# EAGLE board Arduino HomeMonitorv1r4-current (EAGLE 6.6.0)
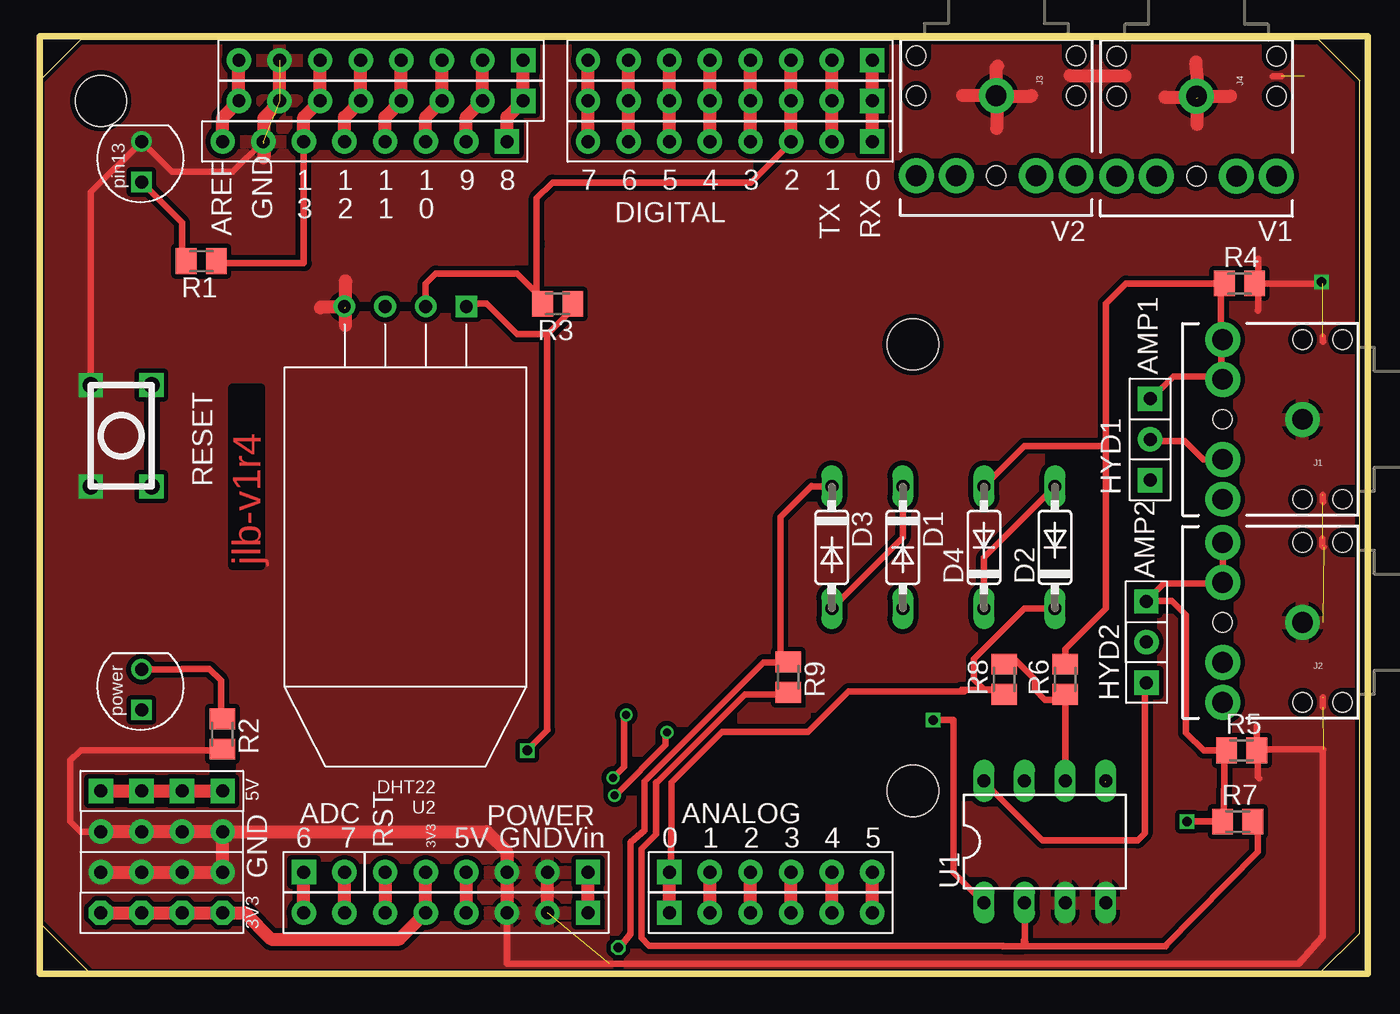
[diagram p0: board, top side]
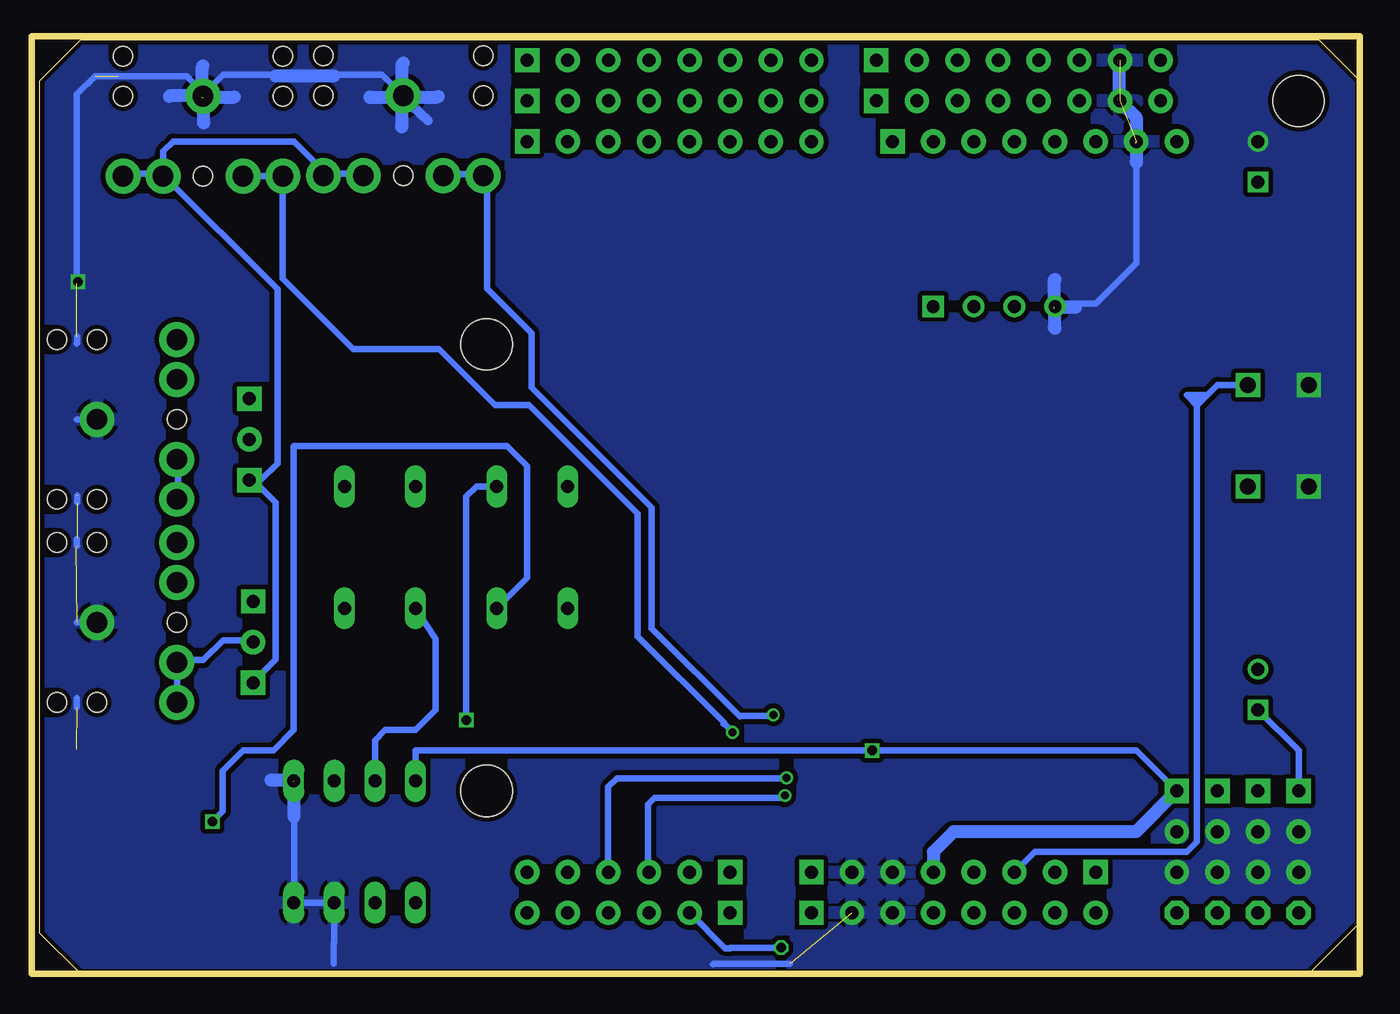
[diagram p1: board, bottom side, seen from below]

Size 82.55 x 58.42 mm. Coordinates in mm from the lower left corner, seen from the top.
Outline: 0,3.17 3.17,0 80.01,0 82.55,2.54 82.55,55.88 80.01,58.42 2.54,58.42 0,55.88 0,3.17
Copper layers (1*16): Top 0.035mm / dielectric 1.5mm / Bottom 0.035mm
Design rules "Dirty_Boards_DRU": minimum track width 5mil, minimum drill 12mil, track to track 5mil, track to pad 5mil, pad to pad 5mil, via to via 5mil, smd to smd 0mil, copper to edge 10mil, drill to drill 10mil, minimum pad ring 10mil, minimum via ring 6mil, stop-mask expansion 2mil, vias tented up to drill 25mil, thermal gap 10mil
Net classes: 0 default: width 0.003 mm, drill 0.254 mm, clearance 0.152 mm
Holes 3.2 mm at 3.81,54.61 54.61,11.43 54.61,11.43 54.61,39.37
Milling: 4 lines

## Footprints (pad centres in the part's own frame; a part is rotated, then mirrored left to right if it is on the bottom)
CK_1*2 = drill 0.813 pad 1.524 square: 1 0,1.27 | drill 0.813 pad 1.524: 2 0,-1.27
DO35-7 = drill 0.813 long: A 3.81,0; C -3.81,0
AUDIO-JACK = drill 1.3 pad 2.184: RING 5,5; RSH 5,2.5; SLEEVE 0,0; TIP 5,-5; TSH 5,-2.5 | hole 1.2: 0,5; -2.5,5; -2.5,-5; 0,-5; 5,0
CK_1X8 = drill 0.813 pad 1.524 square: 1 0,8.89 | drill 0.813 pad 1.524: 2 0,6.35; 3 0,3.81; 4 0,1.27; 5 0,-1.27; 6 0,-3.81; 7 0,-6.35; 8 0,-8.89
CK_1*6 = drill 0.813 pad 1.524 square: 1 0,6.35 | drill 0.813 pad 1.524: 2 0,3.81; 3 0,1.27; 4 0,-1.27; 5 0,-3.81; 6 0,-6.35
M0805 = smd 1.3 x 1.6: 1 -0.95,0; 2 0.95,0
DIL08 = drill 0.813 long: 1 -3.81,-3.81; 2 -1.27,-3.81; 3 1.27,-3.81; 4 3.81,-3.81; 5 3.81,3.81; 6 1.27,3.81; 7 -1.27,3.81; 8 -3.81,3.81
AM2302 = drill 0.8 pad 1.35 square: P$1 -3.81,-13.8 | drill 0.8 pad 1.35: P$2 -1.27,-13.8; P$3 1.27,-13.8; P$4 3.81,-13.8

## Placement (x,y rotation side)
ADC6_1  CK_12  [CK_1*2]  69.22,19.48 180 top
ADC6_2  CK_12  [CK_1*2]  69.45,32.15 180 top
ADC6_3  CK_12  [CK_1*2]  69.21,22.02 0 top
ADC6_4  CK_12  [CK_1*2]  69.46,34.7 0 top
ADC6_7  CK_12  [CK_1*2]  17.78,6.35 90 top
D1  [DO35-7]  53.98,26.67 270 top
D2  [DO35-7]  63.5,26.67 90 top
D3  [DO35-7]  49.53,26.67 270 top
D4  [DO35-7]  59.05,26.67 90 top
J1  [AUDIO-JACK]  78.98,34.68 180 top
J2  [AUDIO-JACK]  78.98,21.98 180 top
J3  [AUDIO-JACK]  59.82,54.94 270 top
J4  [AUDIO-JACK]  72.35,54.89 270 top
PB  CK_1X8  [CK_1X8]  21.34,54.61 270 top
PB1  CK_1X8  [CK_1X8]  20.32,52.07 270 top
PB2  CK_1X8  [CK_1X8]  21.34,57.15 270 top
PC  [CK_1*6]  45.72,6.35 90 top
PC1  [CK_1*6]  45.72,3.81 90 top
PD  CK_1X8  [CK_1X8]  43.18,54.61 270 top
PD1  CK_1X8  [CK_1X8]  43.18,52.07 270 top
PD2  CK_1X8  [CK_1X8]  43.18,57.15 270 top
PD3  CK_1X8  [CK_1X8]  25.4,3.81 270 top
POWER  [CK_1*6]  27.94,6.35 270 top
R1  [M0805]  10.09,44.58 180 top
R2  [M0805]  11.41,14.99 270 top
R3  [M0805]  32.38,41.91 180 top
R4  [M0805]  75.04,43.18 0 top
R5  [M0805]  75.18,13.97 0 top
R6  [M0805]  64.14,18.41 90 top
R7  [M0805]  74.93,9.53 0 top
R8  [M0805]  60.33,18.41 90 top
R9  [M0805]  46.82,18.55 270 top
U1  [DIL08]  62.87,8.26 0 top
U2  DHT22  [AM2302]  22.86,27.94 180 top

## Library data of the parts
ADC6_1-ADC6_4 ADC6_7 PB PB1 PB2 PC PC1 PD PD1-PD3 POWER = CONNECTER
D1-D4 R1-R9 U1 = adafruit
J1-J4 = SparkFun-Connectors
U2 = sensor

## Nets
3V3: PD3.5 POWER.5
5V: PD3.4 POWER.4 U1.8
GND: J1.SLEEVE J2.SLEEVE PB1.7 PB2.7 PB.7 PD3.2 PD3.3 POWER.2 POWER.3 U1.3 U1.4
RST: PD3.6 POWER.6
RX: PD1.1 PD2.1 PD.1
S$3: PC1.4 PC.4
S$4: PC1.3 PC.3
S$5: D2.A D4.C U1.7
S$7: D2.C
S$9: D1.A
S$11: U1.6
S$12: D4.A
S$15: D1.C D3.A U1.1
S$26: PC1.1 PC.1
S$30: PC1.2 PC.2
S$59: D3.C
S$168: PB1.6 PB2.6 PB.6
S$171: PD3.1 POWER.1
S$174: ADC6_7.1 PD3.8
S$177: ADC6_7.2 PD3.7
S$179: PD1.4 PD2.4 PD.4
S$180: PD1.3 PD2.3 PD.3
S$181: PD1.5 PD2.5 PD.5
S$182: PD1.6 PD2.6 PD.6
S$183: PD1.7 PD2.7 PD.7
S$184: PD1.8 PD2.8 PD.8
S$185: PB1.1 PB2.1 PB.1
S$186: PB1.2 PB2.2 PB.2
S$187: PB1.3 PB2.3 PB.3
S$188: PB1.4 PB2.4 PB.4
S$189: PB1.5 PB2.5 PB.5
S$191: PB1.8 PB2.8 PB.8
SCL: PC1.6 PC.6
SDA: PC1.5 PC.5
TX: PD1.2 PD2.2 PD.2

## Tracks (layer width: path | path; a pad name or v marks a point on that pad's centre or on a via)
3V3  (via drill 0.81 pad 1.52)
  Top 0.813: POWER.5 PD3.5 22.48,2.16 14.48,2.16 12.83,3.81 v11.43,3.81 v8.89,3.81 v6.35,3.81 v3.81,3.81
5V  (via drill 0.6, 0.81 pad 1.27, 0.81 pad 1.52)
  Top 0.406: 31.75,15.24 v30.48,13.97
  Top 0.813: POWER.4 PD3.4 | v11.43,11.43 v8.89,11.43 v6.35,11.43 v3.81,11.43
  Bottom 0.406: v3.81,11.43 3.81,13.97 v6.35,16.51 | U1.8 59.05,13.97 v30.48,13.97 13.97,13.97 v11.43,11.43
  Bottom 0.813: POWER.4 26.67,7.62 25.4,8.89 13.97,8.89 v11.43,11.43
GND  (via drill 0.6, 0.81 pad 1.27, 0.81 pad 1.52, 1.02 pad 1.52)  (19 unrouted)
  Top 0.406: 80.23,43.18 75.88,43.17 | 80.28,14.04 76.17,14.04 | v3.81,8.89 2.54,8.89 1.91,9.53 1.91,13.34 2.54,13.97 11.43,13.97 | 80.25,13.97 80.24,2.34 78.74,0.64 64.17,0.61 29.21,0.64 PD3.3 | PB1.7 12.06,50.16 8.26,50.16 v6.35,52.07 3.17,48.9 v3.17,36.83 v3.17,30.48 | 80.23,27.23 80.23,26.76 80.3,26.68 | 80.26,29.95 80.26,29.53 80.29,29.5 | 80.26,39.88 80.26,39.56 80.27,39.54 | 77.13,56.14 77.64,56.14 77.65,56.14 | 76.2,43.85 76.2,44.74 | 76.23,42.59 76.23,41.55 76.17,41.49 | 76.19,13.34 76.19,12.32 76.28,12.22 | 76.14,14.48 76.14,15.5 | 80.26,17.27 80.26,16.68
  Top 0.813: PD3.3 POWER.3 29.21,7.62 27.94,8.89 v11.43,8.89 | v3.81,6.35 v6.35,6.35 v8.89,6.35 v11.43,6.35 v11.43,8.89 | v3.81,8.89 v6.35,8.89 v8.89,8.89 v11.43,8.89 | 59.82,55.07 59.82,56.68 59.92,56.78 | 59.86,54.82 59.86,52.9 59.84,52.87 | 59.92,54.94 57.73,54.94 | 59.95,54.91 62.01,54.91 62.03,54.93 | 64.44,56.18 67.84,56.18 67.87,56.16 | 72.4,53.12 72.38,53.14 72.38,54.86 72.4,56.19 72.32,57.03 | 72.42,54.82 70.39,54.82 70.37,54.84 | 72.42,54.9 74.47,54.9 | 19.13,41.7 19.13,43.31 19.1,43.34 | 19.1,41.64 19.1,40.57 | 19.08,41.72 17.59,41.72 17.55,41.67 | PD3.2 POWER.2 | 14.02,52 14.02,51.09 13.96,51.03
  Bottom 0.406: 80.24,43.17 80.24,55.03 79.11,56.16 73.36,56.16 72.31,55.12 72.22,55.12 71.09,56.25 61.16,56.25 59.85,54.94 | 80.25,34.68 J1.SLEEVE | J2.SLEEVE 80.25,21.98 | 64.17,0.61 64.17,1.88 64.14,1.91 U1.3 U1.4 | 66.62,4.61 66.66,4.61 66.66,12 | 19.05,41.91 16.51,41.91 13.97,44.45 13.97,51.44 | 80.26,17.27 80.26,16.68 80.25,16.67 | 80.23,27.19 80.23,26.78 80.22,26.76 | 80.22,29.93 80.22,29.48 80.21,29.48 | 80.23,39.86 80.23,39.45 80.25,39.44 | 35.63,0.62 40.43,0.62 40.45,0.6
  Bottom 0.61: 58.28,53.37 59.85,54.85
  Bottom 0.813: 59.9,54.87 59.9,56.9 59.81,56.99 | 59.93,54.9 59.93,53 59.9,52.97 | 57.63,54.87 57.66,54.84 61.9,54.84 61.93,54.81 | 67.79,56.17 64.17,56.17 64.15,56.16 | 72.33,54.78 72.33,53.27 72.3,53.23 | 72.45,54.93 74.38,54.93 74.44,54.87 | 72.42,54.84 70.39,54.84 | 72.39,55.05 72.39,56.75 72.36,56.78 | 66.73,12.11 68.12,12.11 | 66.67,12.04 66.67,9.83 | 19.1,41.61 19.1,40.45 19.04,40.39 | 19.1,41.73 19.1,43.37 19.04,43.43 | 19.1,41.7 17.76,41.7 | 13.96,51.96 13.96,50.78 13.95,50.76
  other vias: 80.18,43.29
  pour Bottom (isolate 0.305): 2.45,-0.12 82.67,-0.07 82.7,-0.1 82.7,58.14 82.58,58.26 0.29,58.26 0.03,-0.12 2.82,-0.12
  pour Top (isolate 0.305): 0,-0.11 82.61,-0.11 82.71,0 82.71,58.21 0.32,58.21 0.21,58.11 0.21,0
LED+  (via drill 0.81 pad 1.27)
  Top 0.406: 8.89,44.45 8.89,46.99 v6.35,49.53
LED-1  (via drill 0.81 pad 1.27)
  Top 0.406: v6.35,19.05 8.89,19.05
RST  (via drill 1.02 pad 1.52)
  Top 0.406: v6.99,36.83 v6.99,30.48
  Top 0.813: POWER.6 PD3.6
  Bottom 0.406: POWER.6 20.32,7.62 10.79,7.62 10.19,8.23 10.19,35.54 | v6.99,36.83 8.89,36.83 9.53,36.2 | 10.16,36.2 9.53,36.2 | 10.19,35.54 10.16,36.2 | 10.19,35.54 9.53,36.2 | 10.16,36.2 10.79,36.2 10.19,35.54
RX
  Top 0.813: PD1.1 PD.1 PD2.1
S$1
  Top 0.813: 15,57.2 14.98,57.2 14.98,54.51 13.99,53.53 13.99,52.01
S$2
  Top 0.406: 73.91,13.97 74.1,13.97 74.07,9.29
S$3
  Top 0.813: PC1.4 PC.4
S$4
  Top 0.813: PC1.3 PC.3
S$5
  Top 0.406: D4.C 59.05,26.04 D2.A
  Bottom 0.406: D4.C 57.78,20.95 57.78,16.51 59.05,15.24 60.96,15.24 61.59,14.61 U1.7
S$6
  Top 0.406: 73.99,27.15 73.99,24.61 74.04,24.56
S$7
  Top 0.406: D2.C 61.59,22.86 58.42,19.68 58.42,18.41 59.05,17.78 60.33,17.78
S$8
  Bottom 0.406: 73.9,32.14 73.9,29.6
S$9  (via drill 0.6)
  Top 0.406: v71.75,9.53 74.3,9.53
  Bottom 0.406: v71.75,9.53 71.12,10.16 71.12,12.7 69.85,13.97 67.94,13.97 66.67,15.24 66.67,33.02 53.34,33.02 52.07,31.75 52.07,24.77 D1.A
S$10
  Top 0.406: 76.2,9.53 76.2,7.62 70.41,1.76
S$11
  Top 0.406: U1.6 64.14,17.14 62.87,17.14 62.23,17.78 62.23,18.41 60.96,19.68
S$12
  Top 0.406: 64.14,19.05 64.14,20.32 66.67,22.86 66.67,33.02 | 66.67,33.02 66.67,41.91 67.94,43.18 73.88,43.18 | 74.33,43.17 73.88,43.18 | 73.88,43.18 73.9,37.22 | 66.67,33.02 61.59,33.02 D4.A
S$13
  Top 0.406: 57.84,17.67 50.58,17.67 48.04,15.13 42.66,15.13 39.51,11.98
S$14
  Top 0.406: 24.13,41.91 24.13,43.18 24.77,43.81 29.84,43.81 31.07,42.57 31.07,45.74
S$15  (via drill 0.6)
  Top 0.406: D3.A 53.98,27.3 D1.C | v55.88,15.88 57.15,15.88 57.15,6.35 U1.1
  Bottom 0.406: D1.C 55.24,30.48 55.88,29.84 v55.88,15.88
S$16
  Top 0.406: 8.89,19.07 10.6,19.07 11.33,18.34 11.33,16.08 11.45,15.96
S$17
  Top 0.406: 16.49,44.45 11.32,44.45 11.06,44.71
S$18
  Top 0.406: 74.04,24.41 70.31,24.41 69.21,23.32 70.82,23.32 71.7,22.44 71.7,15.06 72.8,13.96 74.48,13.96 74.55,13.89
S$19
  Top 0.406: 73.89,37.35 70.89,37.35 69.51,35.97
S$20
  Top 0.406: 73.89,32.17 72.77,32.17 71.61,33.34 69.58,33.34 69.42,33.49
S$21
  Bottom 0.406: 73.98,17 73.98,19.58 74.02,19.62 72.33,19.62 71.1,20.85 69.16,20.85 69.11,20.81
S$22
  Bottom 0.406: 69.55,30.88 69.2,30.88 67.8,29.48 67.8,19.65 69.11,18.34
S$23
  Top 0.406: 69.11,18.16 69.11,8.77 68.67,8.34 62.71,8.34 59.03,12.02
S$24
  Bottom 0.813: 15.05,57.23 15.05,54.69 14.95,54.59 14.95,54.54 13.97,53.56 13.97,52.09 13.99,52.06
S$25
  Top 0.406: 33.66,41.91 31.75,40.01 29.84,40.01 27.94,41.91 26.67,41.91
S$26
  Top 0.813: PC1.1 PC.1
S$27
  Top 0.406: 31.72,15.22 31.72,39.94 31.77,39.99
S$28
  Top 0.406: 61.58,4.34 61.6,4.34 61.6,1.97
S$29
  Top 0.406: 31.07,45.55 31.07,48.51 32,49.44
S$30
  Top 0.813: PC1.2 PC.2
S$31
  Top 0.406: 59.7,17.76 57.64,17.76
S$32
  Top 0.406: 46.89,17.49 44.11,17.49 38.6,11.98
S$33
  Top 0.406: 38.54,11.98 38.54,8.71 37.63,7.81 37.63,2.24 38.1,1.73 60.25,1.73
S$34
  Top 0.406: 60.21,1.72 61.56,1.72 61.56,2.1
S$35
  Top 0.406: 46.59,19.48 45.26,19.48 37.81,12.04 37.81,8.96 36.94,8.23 36.94,2.48 36.24,1.63
S$36  (via drill 0.6)
  Bottom 0.406: v36.18,1.63 39.34,1.63
S$37
  Top 0.406: 32.07,49.5 44.47,49.5 47.09,52.12
S$38
  Top 0.406: 39.51,6.41 39.39,6.29
S$39
  Top 0.406: 39.52,11.97 39.52,8.82
S$40
  Bottom 0.406: 39.31,3.78 39.39,3.87
S$45
  Bottom 0.406: 69.35,30.87 68.74,30.87 67.69,31.92 67.69,42.83 74.92,50.06 77.36,50.06 77.62,49.8
S$46
  Bottom 0.406: 39.36,1.6 39.68,1.6 41.9,3.82
S$47
  Top 0.406: 39.48,8.86 39.48,6.44 39.3,6.27
S$48
  Bottom 0.406: 74.84,49.97 74.84,51.45 74.23,52.06 66.65,52.06 64.64,50.06 62.29,50.06 62.03,49.8
S$49
  Bottom 0.406: 57.45,50.02 54.57,50.02 54.57,42.85 51.81,40.09 51.81,36.68 44.28,29.16 44.28,21.61 38.76,16.09
S$50
  Bottom 0.406: 70.25,49.89 67.61,49.89 67.36,49.64 67.36,43.48 62.97,39.09 57.59,39.09 54.07,35.57 51.95,35.57 45.16,28.78 45.16,21.1 39.77,15.71
S$51  (via drill 0.5)
  Bottom 0.406: 38.78,16.12 36.75,16.12 v36.68,16.2
S$52  (via drill 0.5)
  Bottom 0.406: 39.8,15.62 39.73,15.62 v39.22,15.11
S$53
  Top 0.406: 36.53,16.2 36.53,12.93 35.88,12.28
S$54
  Top 0.406: 39.15,15.11 39.15,14.31 36.02,11.19
S$55
  Top 0.406: 70.44,1.73 61.66,1.73 61.66,1.98
S$56  (via drill 0.5)
  other vias: 35.85,12.25
S$57  (via drill 0.5)
  other vias: 35.95,11.14
S$58
  Top 0.406: 46.33,19.59 46.33,28.57 48.26,30.5
S$59
  Top 0.406: D3.C 48.26,30.48
S$60
  Bottom 0.406: 35.87,12.22 46.45,12.22 47,11.68 47,5.99 46.94,5.93
S$61
  Bottom 0.406: 35.87,11.01 44.09,11.01 44.52,10.59 44.52,6.41 44.46,6.35
S$69
  Top 0.406: 46.83,17.49 46.91,17.56
S$168
  Top 0.406: 16.51,44.45 PB1.6
  Top 0.813: PB2.6 PB.6 16.51,53.59 PB1.6
S$171
  Top 0.813: PD3.1 POWER.1
S$174
  Top 0.813: PD3.8 ADC6_7.1
S$177
  Top 0.813: PD3.7 ADC6_7.2
S$179
  Top 0.813: PD1.4 PD.4 PD2.4
S$180
  Top 0.813: PD1.3 PD.3 PD2.3
S$181
  Top 0.813: PD1.5 PD.5 PD2.5
S$182
  Top 0.813: PD2.6 PD.6 PD1.6
S$183
  Top 0.813: PD1.7 PD.7 PD2.7
S$184
  Top 0.813: PD2.8 PD.8 PD1.8
S$185
  Top 0.813: PB1.1 29.21,53.59 PB.1 PB2.1
S$186
  Top 0.813: PB1.2 26.67,53.59 PB.2 PB2.2
S$187
  Top 0.813: PB1.3 24.13,53.59 PB.3 PB2.3
S$188
  Top 0.813: PB2.4 PB.4 21.59,53.59 PB1.4
S$189
  Top 0.813: PB1.5 19.05,53.59 PB.5 PB2.5
S$191
  Top 0.813: PB1.8 11.43,53.59 PB.8 PB2.8
SCL
  Top 0.813: PC1.6 PC.6
SDA
  Top 0.813: PC1.5 PC.5
TX
  Top 0.813: PD2.2 PD.2 PD1.2

## Text on the board
Top: jlb-v1r4
tPlace: pin13 | 1 | 1 | 1 | 1 | 9 | 8 | 7 | 6 | 5 | 4 | 3 | 2 | 1 | 0 | GND | 3 | 2 | 1 | 0 | DIGITAL | V2 | V1 | AREF | TX | RX | AMP1 | RESET | HYD1 | AMP2 | HYD2 | power | 5V | ADC | POWER | ANALOG | 6 | 7 | RST | 3V3 | 5V | GND | Vin | 0 | 1 | 2 | 3 | 4 | 5 | GND | 3V3